# EAGLE board kaya-insolev1 (EAGLE 9.1.2)
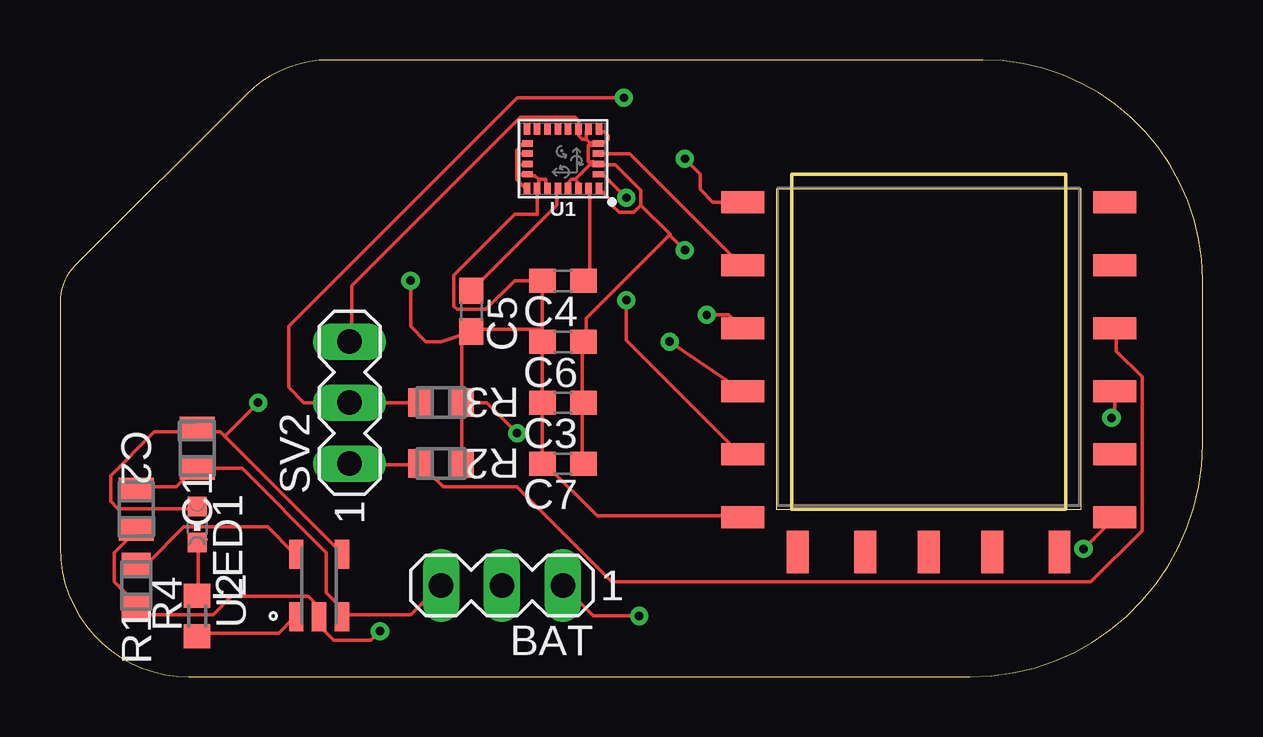
[diagram p0: board, top side]
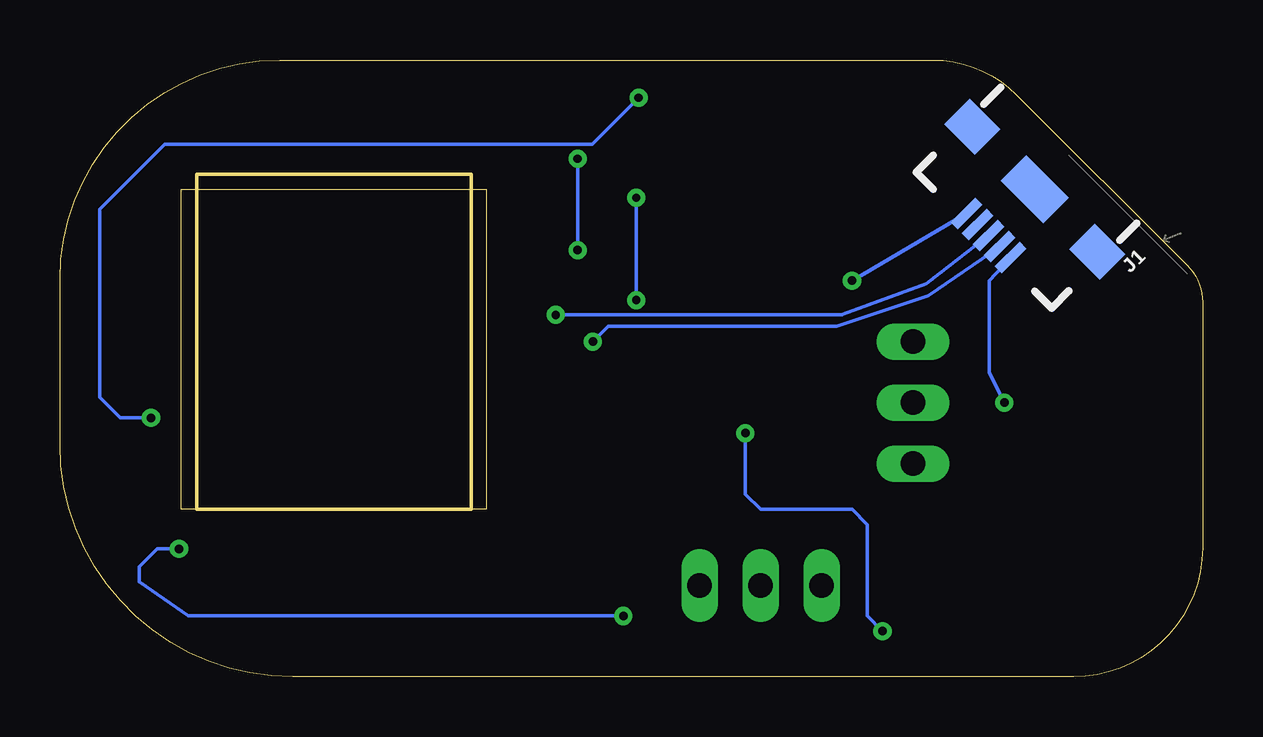
[diagram p1: board, bottom side, seen from below]

Size 47.61 x 25.7 mm. Coordinates in mm from the lower left corner, seen from the top.
Outline: 7.76,24.27 0.63,17.15 arc45 0,15.61 0,5.38 arc90 5.38,0 37.91,0 arc90 47.61,9.7 47.61,16.55 arc90 38.45,25.7 11.23,25.7 arc45 7.76,24.27
Outline: 30.48,6.98 30.48,20.95 41.91,20.95 41.91,6.98 30.48,6.98
Copper layers (1*16): Top 0.035mm / dielectric 1.5mm / Bottom 0.035mm
Design rules "default *": minimum track width 5mil, minimum drill 0.2mm, track to track 5mil, track to pad 5mil, pad to pad 5mil, via to via 5mil, smd to smd 5mil, copper to edge 5mil, drill to drill 8mil, minimum pad ring 10mil, minimum via ring 8mil, stop-mask expansion 4mil, vias tented up to drill 0mil, thermal gap 10mil
tRestrict: area 29.8,6.4 to 42.5,21.6
bRestrict: area 29.8,6.4 to 42.5,21.6
vRestrict: area 29.8,6.4 to 42.5,21.6
Milling: area 29.8,7 to 42.5,20.3

## Footprints (pad centres in the part's own frame; a part is rotated, then mirrored left to right if it is on the bottom)
MA03-1 = drill 1.016 long: 1 -2.54,0; 2 0,0; 3 2.54,0
YAG_CC0805 = smd 0.965 x 1.448: 1 -0.826,0; 2 0.826,0
C0603 = smd 1.1 x 1: 1 -0.85,0; 2 0.85,0
USB-B-MICRO-SMD = smd 1.45 x 0.4: D+ 2.725,0; D- 2.725,0.65; GND 2.725,-1.3; ID 2.725,-0.65; VBUS 2.725,1.3 | smd 1.5 x 1.8: SHIELD1 0,3.685; SHIELD2 0,-3.685 | smd 1.5 x 2.5: SHIELD3 0,0
CHIPLED_0603 = smd 0.8 x 0.8: A 0,-0.75; C 0,0.75
RC0805N = smd 1.006 x 1.2: 1 -0.853,0; 2 0.853,0
R0603 = smd 1 x 1.1: 1 -0.85,0; 2 0.85,0
LGA-24-3.5X3 = smd 0.27 x 0.45: 1 -1.505,1.225; 6 -1.505,-1.225; 7 -1.075,-1.225; 8 -0.645,-1.225; 9 -0.215,-1.225; 10 0.215,-1.225; 11 0.645,-1.225; 12 1.075,-1.225; 13 1.505,-1.225; 18 1.505,1.225; 19 1.075,1.225; 20 0.645,1.225; 21 0.215,1.225; 22 -0.215,1.225; 23 -0.645,1.225; 24 -1.075,1.225 | smd 0.45 x 0.27: 2 -1.475,0.645; 3 -1.475,0.215; 4 -1.475,-0.215; 5 -1.475,-0.645; 14 1.475,-0.645; 15 1.475,-0.215; 16 1.475,0.215; 17 1.475,0.645
SOT23-5 = smd 1.2 x 0.6: 1 -1.306,0.95; 2 -1.306,0; 3 -1.306,-0.95; 4 1.306,-0.95; 5 1.306,0.95
BLE-NANO-PKG = smd 1.778 x 0.914: A3 7.75,4.375; A4 7.75,1.75; GND$6 -7.75,-3.5; GND$8 7.75,-0.875; RXD -7.75,1.75; SCL -7.75,-0.875; SDA -7.75,7; SWCLK 7.75,9.625; SWDIO 7.75,7; TXD -7.75,4.375; VDD -7.75,9.625; VIN 7.75,-3.5 | smd 0.914 x 1.778: P06 2.65,-4.95; P07 5.45,-4.95; P15 0,-4.95; P28 -5.45,-4.95; P29 -2.65,-4.95

## Placement (x,y rotation side)
BAT  [MA03-1]  18.41,3.81 180 top
C1  CC0805ZRY5V6BB475  [YAG_CC0805]  5.72,9.53 90 top
C2  CC0805ZRY5V6BB475  [YAG_CC0805]  3.18,6.98 270 top
C3  .1u  [C0603]  20.96,11.43 180 top
C4  0.1u  [C0603]  20.96,16.51 180 top
C5  10n  [C0603]  17.15,15.24 270 top
C6  .1u  [C0603]  20.96,13.97 180 top
C7  10u  [C0603]  20.96,8.89 180 top
J1  [USB-B-MICRO-SMD]  6.99,20.32 225 bottom
LED1  [CHIPLED_0603]  5.72,6.35 180 top
R1  ERJ-6GEYJ203V  [RC0805N]  3.18,3.81 90 top
R2  ERJ-6GEYJ203V  [RC0805N]  15.88,8.89 180 top
R3  ERJ-6GEYJ203V  [RC0805N]  15.88,11.43 180 top
R4  [R0603]  5.72,2.54 90 top
SV2  [MA03-1]  12.06,11.43 90 top
U1  LSM9DS1  [LGA-24-3.5X3]  20.96,21.59 180 top
U2  MCP73832T-2ACI/OT  [SOT23-5]  10.79,3.81 90 top
U$1  BLE-NANO  [BLE-NANO-PKG]  36.2,10.16 0 top

## Library data of the parts
BAT SV2 = con-lstb; OC_FARNELL: unknown; OC_NEWARK: unknown
C1 C2 = Yageo 4.7uF Cap; MANUFACTURER_PART_NUMBER: CC0805ZRY5V6BB475; VENDOR: Yageo
C3-C7 = rcl; SPICEPREFIX: C
J1 = SparkFun-Connectors; PROD_ID: CONN-11752
LED1 = led
R1-R3 = Panasonic 20K Res; MANUFACTURER_PART_NUMBER: ERJ6GEYJ203V; VENDOR: Panasonic
R4 = rcl; SPICEPREFIX: R
U1 = SparkFun-Sensors; PROD_ID: IC-12536
U2 = MCP73832T-2ACI_OT; AVAILABILITY: Unavailable; MF: Microchip; MP: MCP73832T-2ACI-OT; PACKAGE: SOT-23-5 Microchip; PRICE: None
U$1 = BLE-NANO

## Nets
GND: C2.2 C3.2 C4.2 C5.2 C6.2 C7.2 J1.GND R1.1 R2.1 R3.1 U1.14 U1.15 U1.16 U1.17 U1.18 U1.19 U1.20 U2.2 U$1.GND$6
N$3: U1.4 U$1.SDA
N$4: U1.2 U$1.SCL
N$5: C4.1 U1.24
N$6: C5.1 U1.21
N$8: LED1.C R4.2
N$9: R4.1 U2.1
N$13: R2.2 SV2.1 U$1.A3
N$14: R3.2 SV2.2 U$1.A4
N$16: R1.2 U2.5
RXD: J1.D- U$1.RXD
TXD: J1.D+ U$1.TXD
VBAT: BAT.3 C1.1 C2.1 U2.3
VBUS: C1.2 J1.VBUS LED1.A U2.4
VDD: C3.1 C6.1 C7.1 SV2.3 U1.1 U1.3 U1.5 U1.6 U1.7 U1.8 U1.22 U1.23 U$1.VDD
VIN: BAT.1 U$1.VIN

## Tracks (layer width: path | path; a pad name or v marks a point on that pad's centre or on a via)
GND  (via drill 0.35)
  Top 0.152: C2.2 3.18,6.1 2.26,5.18 2.26,3.96 3.18,3.05 R1.1 3.18,2.9 3.48,2.59 6.38,2.59 7.14,3.35 10.34,3.35 10.79,2.9 U2.2 10.79,2.13 11.4,1.52 12.95,1.52 v13.33,1.91 | 20.09,11.43 20.09,8.99 C7.2 20.24,8.84 22.38,6.71 28.32,6.71 U$1.GND$6 | 16.74,11.43 16.74,9.91 16.74,8.99 R2.1 | 19.02,20.73 19.33,20.42 U1.18 | 19.02,20.73 19.33,21.03 U1.17 19.48,20.88 19.79,20.88 19.94,20.73 | 19.02,21.18 19.18,21.34 19.33,21.34 U1.16 | 19.02,20.73 19.02,21.18 | 19.02,21.64 19.18,21.79 19.33,21.79 U1.15 | 19.02,21.18 19.02,21.64 | 19.02,21.64 19.02,21.95 19.33,22.25 U1.14 | 19.94,20.73 19.94,20.42 U1.19 19.88,19.27 18.95,19.27 16.42,16.73 16.42,15.45 16.55,15.31 17.74,15.31 18.94,16.51 C4.2 20.09,16.46 20.09,14.48 | 19.94,20.73 20.24,20.73 20.24,20.42 U1.20 | 20.09,14.48 20.09,14.02 C6.2 20.09,13.87 20.09,11.43 | 20.09,14.48 17.2,14.48 C5.2 | 16.74,11.43 16.74,14.02 17.04,14.33 C5.2 | 16.74,11.43 R3.1 | 20.09,11.43 C3.2 | C5.2 15.88,13.97 15.24,13.97 14.61,14.61 v14.61,16.51 | v19.05,10.16 17.78,11.43 16.74,11.43
  Bottom 0.152: J1.GND v14.61,16.51 | v13.33,1.91 13.97,2.54 13.97,6.35 14.61,6.98 18.41,6.98 19.05,7.62 v19.05,10.16
N$3
  Top 0.152: U1.4 22.53,21.79 23.75,21.79 28.32,17.22 U$1.SDA
N$4  (via drill 0.35)
  Top 0.152: v23.6,19.96 22.68,20.88 22.53,20.88 U1.2 | v23.6,15.7 23.6,14.02 28.32,9.3 U$1.SCL
  Bottom 0.152: v23.6,15.7 v23.6,19.96
N$5
  Top 0.152: U1.24 22.07,20.27 22.07,16.76 21.92,16.61 C4.1
N$6
  Top 0.152: U1.21 20.7,20.27 20.7,19.66 17.2,16.15 C5.1
N$8
  Top 0.152: LED1.C 5.77,5.49 5.77,3.51 R4.2
N$9
  Top 0.152: R4.1 5.77,1.83 9.12,1.83 9.73,2.44 U2.1
N$13
  Top 0.152: SV2.1 12.17,8.84 14.91,8.84 R2.2 15.06,8.84 15.98,7.92 19.02,7.92 22.99,3.96 42.95,3.96 45.09,6.1 45.09,12.5 44.02,13.56 44.02,14.48 U$1.A3
N$14  (via drill 0.35)
  Top 0.152: R3.2 SV2.2 10.16,11.43 9.53,12.06 9.53,14.61 19.05,24.13 v23.5,24.13 | v43.82,10.8 43.95,10.92 U$1.A4
  Bottom 0.152: v23.5,24.13 25.43,22.2 43.24,22.2 45.94,19.49 45.94,11.65 45.09,10.8 v43.82,10.8
N$16
  Top 0.152: R1.2 3.18,4.72 3.63,4.72 5.16,6.25 8.66,6.25 9.73,5.18 U2.5
RXD  (via drill 0.35)
  Top 0.152: U$1.RXD v25.4,13.97
  Bottom 0.152: J1.D- 11.43,15.88 15.24,14.61 24.77,14.61 v25.4,13.97
TXD  (via drill 0.35)
  Top 0.152: v26.95,15.09 27.86,15.09 28.32,14.63 U$1.TXD
  Bottom 0.152: v26.95,15.09 15.01,15.09 14.99,15.11 11.51,16.38 J1.D+
VBAT
  Top 0.152: C2.1 3.18,7.92 4.85,7.92 5.61,8.69 C1.1 5.77,8.69 7.6,8.69 11.1,5.18 11.1,3.51 12.01,2.59 | 12.01,2.59 14.61,2.59 15.82,3.81 BAT.3 | 12.01,2.59 11.86,2.59 U2.3 12.01,2.59
VBUS  (via drill 0.35)
  Top 0.152: LED1.A 5.61,7.01 2.41,7.01 2.11,7.31 2.11,8.38 3.94,10.21 5.61,10.21 C1.2 6.35,10.21 6.68,10.21 6.86,10.03 | 6.86,10.03 11.71,5.18 U2.4 | 6.86,10.03 v8.26,11.43
  Bottom 0.152: J1.VBUS 8.89,16.51 8.89,12.7 v8.26,11.43
VDD  (via drill 0.35)
  Top 0.152: 22.23,22.25 22.07,22.25 21.92,22.4 | 22.23,22.25 22.38,22.25 U1.5 22.53,22.25 22.68,22.25 22.84,22.4 22.84,22.56 22.68,22.71 22.53,22.71 U1.6 | 21.92,22.4 21.92,22.71 U1.7 | 21.92,22.4 21.77,22.4 21.62,22.56 21.62,22.71 U1.8 21.62,22.86 21.62,23.17 21.46,23.32 19.18,23.32 12.17,16.31 12.17,14.02 SV2.3 | 21.77,11.43 21.77,8.99 C7.1 | 21.77,11.43 21.77,13.87 C6.1 21.92,14.02 21.92,14.94 25.43,18.44 | 21.77,11.43 C3.1 | 21.46,20.73 21.31,20.73 21.16,20.57 21.16,20.42 U1.22 | 21.46,20.73 21.62,20.57 21.62,20.42 U1.23 | 24.21,19.66 23.9,19.36 23.29,19.36 22.99,19.66 22.99,19.81 22.53,20.27 U1.1 | 24.21,19.66 24.21,20.27 23.14,21.34 22.53,21.34 U1.3 22.38,21.34 22.23,21.34 | 21.46,20.73 22.07,21.34 22.23,21.34 | 24.21,19.66 25.43,18.44 | 28.47,19.66 U$1.VDD 27.21,19.79 26.67,20.32 26.67,20.95 v26.04,21.59 | 25.43,18.44 | 25.43,18.44 25.43,18.39 v26.04,17.78 | 22.23,22.25 22.23,22.14 22,22.14 22,21.47 22.23,21.47 22.23,21.34
  Bottom 0.152: v26.04,17.78 v26.04,21.59
VIN  (via drill 0.35)
  Top 0.152: v42.65,5.33 43.87,6.55 U$1.VIN | BAT.1 22.23,2.54 v24.13,2.54
  Bottom 0.152: v24.13,2.54 42.27,2.54 44.3,3.96 44.3,4.6 43.56,5.33 v42.65,5.33